# EAGLE board VisSleepSchema (EAGLE 9.6.2)
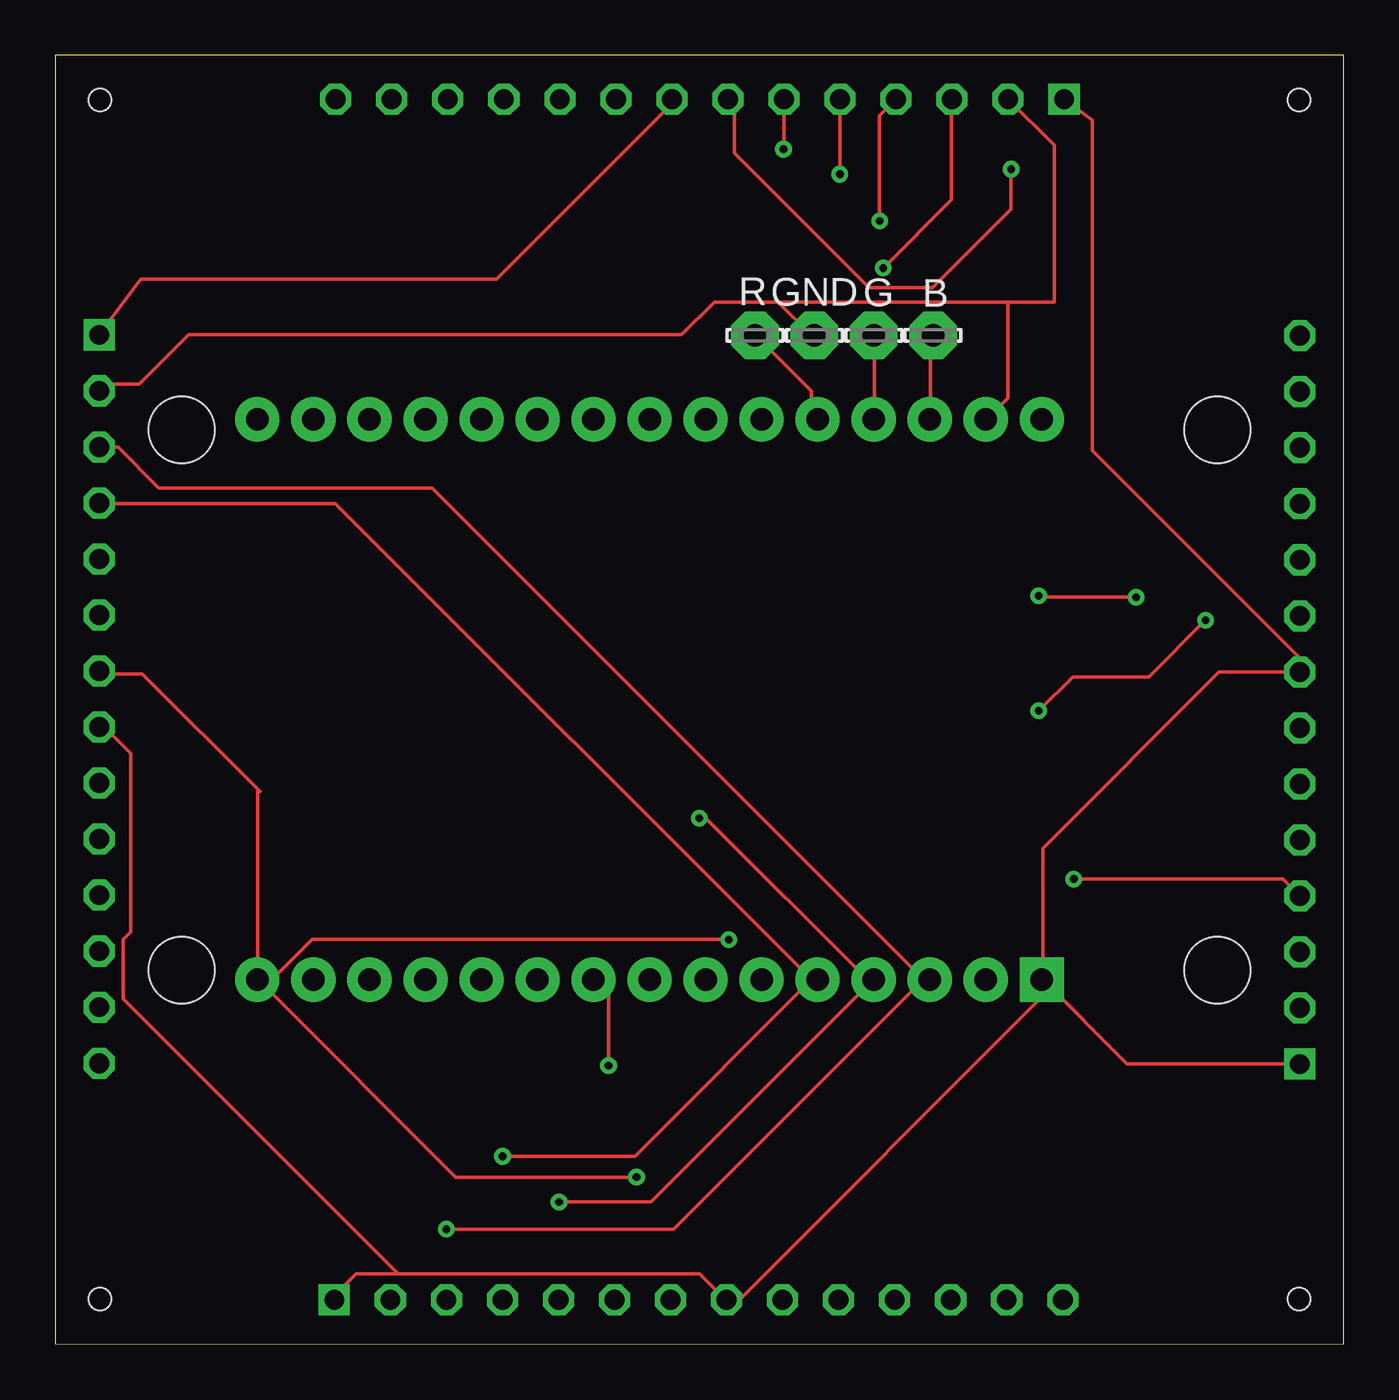
[diagram p0: board, top side]
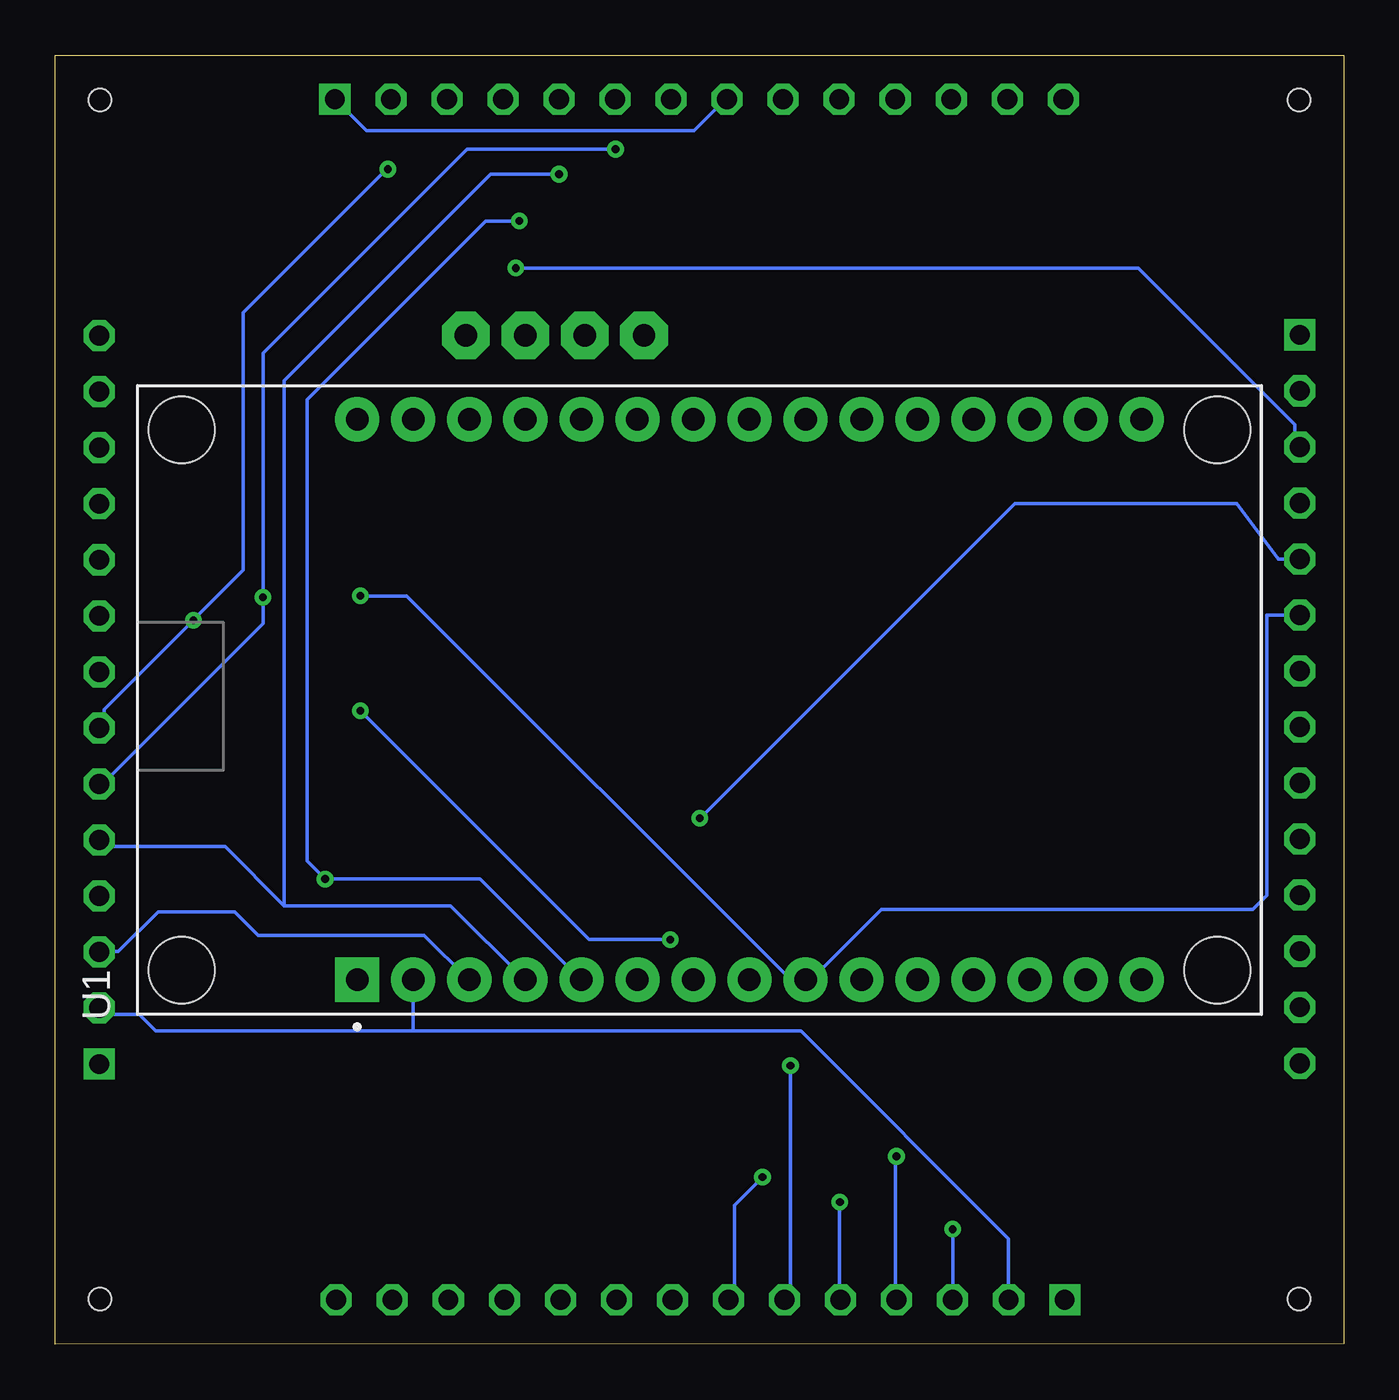
[diagram p1: board, bottom side, seen from below]

Size 58.42 x 58.44 mm. Coordinates in mm from the lower left corner, seen from the top.
Outline: 0,0.03 58.42,0 58.42,58.44 0,58.44 0,0.03
Copper layers (1*16): Top 0.035mm / dielectric 1.5mm / Bottom 0.035mm
Design rules "default": minimum track width 6mil, minimum drill 0.35mm, track to track 6mil, track to pad 6mil, pad to pad 6mil, via to via 6mil, smd to smd 6mil, copper to edge 40mil, drill to drill 6mil, minimum pad ring 10mil, minimum via ring 8mil, stop-mask expansion 4mil, vias tented up to drill 0mil, thermal gap 10mil
Holes 1 mm at 2.03,56.41 56.39,56.41 2.03,2.06 56.39,2.06

## Footprints (pad centres in the part's own frame; a part is rotated, then mirrored left to right if it is on the bottom)
2.8_LCD = drill 0.9 square: 1 8.49,2 | drill 0.9 octagon: 2 11.03,2; 3 13.57,2; 4 16.11,2; 5 18.65,2; 6 21.19,2; 7 23.73,2; 8 26.27,2; 9 28.81,2; 10 31.35,2; 11 33.89,2; 12 36.43,2; 13 38.97,2; 14 41.51,2
LSP10 = drill 1.016 pad 2.159 octagon: MP 0,0
MODULE_ESP32_DEVKIT_V1 = drill 1.02 pad 2 square: 1 -12.7,15.515 | drill 1.02 pad 2: 2 -12.7,12.975; 3 -12.7,10.435; 4 -12.7,7.895; 5 -12.7,5.355; 6 -12.7,2.815; 7 -12.7,0.275; 8 -12.7,-2.265; 9 -12.7,-4.805; 10 -12.7,-7.345; 11 -12.7,-9.885; 12 -12.7,-12.425; 13 -12.7,-14.965; 14 -12.7,-17.505; 15 -12.7,-20.045; 16 12.7,-20.045; 17 12.7,-17.505; 18 12.7,-14.965; 19 12.7,-12.425; 20 12.7,-9.885; 21 12.7,-7.345; 22 12.7,-4.805; 23 12.7,-2.265; 24 12.7,0.275; 25 12.7,2.815; 26 12.7,5.355; 27 12.7,7.895; 28 12.7,10.435; 29 12.7,12.975; 30 12.7,15.515 | hole 3: -12.28,-23.475; 12.23,-23.475; 12.23,23.475; -12.28,23.475

## Placement (x,y rotation side)
A1  TFT  [2.8_LCD]  4.17,0.03 0 top
A2  TFT  [2.8_LCD]  0,54.25 270 top
A3  TFT  [2.8_LCD]  54.23,58.45 180 top
A4  TFT  [2.8_LCD]  58.42,4.22 90 top
B  LSP10  [LSP10]  39.8,45.75 0 top
G  LSP10  [LSP10]  37.11,45.75 0 top
GND  LSP10  [LSP10]  34.42,45.75 0 top
R  LSP10  [LSP10]  31.73,45.75 0 top
U1  ESP32-DEVKIT-V1  [MODULE_ESP32_DEVKIT_V1]  29.21,29.24 90 bottom

## Library data of the parts
A1-A4 = tft
B G GND R = solpad
U1 = ESP32-DEVKIT-V1; AVAILABILITY: Not in stock; CHECK_PRICES: https://www.snapeda.com/parts/ESP32-DEVKIT-V1/Do+it/view-part/?ref=eda; DESCRIPTION: Dual core, Wi-Fi: 2.4 GHz up to 150 Mbits/s,BLE (Bluetooth Low Energy) and legacy Bluetooth, 32 bits, Up to 240 MHz; MF: Do it; MP: ESP32-DEVKIT-V1; PACKAGE: None; PRICE: None; SNAPEDA_LINK: https://www.snapeda.com/parts/ESP32-DEVKIT-V1/Do+it/view-part/?ref=snap

## Nets
N$1: A1.1 A1.8 A2.1 A2.8 A3.1 A3.8 A4.1 A4.8 U1.1
N$2: A2.2 A3.2 GND.MP U1.29
N$3: A1.3 A2.3 A3.3 A4.3 U1.3
N$4: B.MP U1.28
N$5: G.MP U1.27
N$6: A1.4 A2.4 A3.4 A4.4 U1.5
N$7: A1.5 A2.5 A3.5 A4.5 U1.4
N$8: A1.6 A2.6 A3.6 A4.6 U1.9
N$9: A1.7 A2.7 A3.7 A4.7 U1.15
N$10: R.MP U1.26
S$1: A1.2
S$2: A4.2 U1.2

## Tracks (layer width: path | path; a pad name or v marks a point on that pad's centre or on a via)
N$1
  Top 0.152: A2.1 3.89,48.3 20.02,48.3 27.94,56.22 A3.8 | 44.77,16.54 48.58,12.73 56.2,12.73 A4.1 | 44.77,16.54 44.77,22.49 52.76,30.49 A4.8 56.42,31.12 47.03,40.51 47.03,55.48 A3.1 | 44.77,16.54 U1.1 44.73,15.74 30.7,1.71 30.16,2.25 | 15.56,3.2 29.21,3.2 29.96,2.45 30.16,2.25 | 15.56,3.2 13.65,3.2 12.7,2.25 A1.1 | A2.8 2.23,27.98 3.43,26.78 3.43,18.71 3.09,18.36 3.09,15.67 15.56,3.2 | 30.16,2.25 A1.8
  Bottom 0.152: A3.1 44.31,55.02 29.46,55.02 28.26,56.22 A3.8
N$2
  Top 0.152: 43.18,47.26 43.18,42.89 42.23,41.94 U1.29 | A3.2 45.29,54.36 45.29,47.26 43.18,47.26 | 32.78,47.26 29.88,47.26 28.4,45.77 6.06,45.77 3.81,43.52 2.22,43.52 A2.2 | 32.78,47.26 34.29,45.75 GND.MP | 32.78,47.26 43.18,47.26
N$3  (via drill 0.35)
  Top 0.152: v17.73,5.22 v17.74,5.21 18.05,5.21 18.06,5.21 28.04,5.21 39.37,16.54 | 39.37,16.54 17.08,38.82 4.7,38.82 2.86,40.67 2.22,40.67 A2.3 | 39.37,16.54 U1.3 | v37.54,48.79 40.64,51.89 40.64,56.22 A3.3
  Bottom 0.152: A1.3 17.73,2.03 v17.73,5.22 | A4.3 56.2,17.81 55.56,17.81 53.76,19.61 50.29,19.61 49.23,18.54 41.69,18.54 39.69,16.54 U1.3 | v37.54,48.79 9.31,48.79 2.22,41.71 2.22,40.98 A2.3
N$4
  Top 0.152: U1.28 39.69,41.94 39.69,45.75 B.MP
N$5
  Top 0.152: U1.27 37.15,41.94 37.15,45.75 G.MP
N$6  (via drill 0.35)
  Top 0.152: v20.28,8.52 26.28,8.52 34.29,16.54 | 34.29,16.54 12.7,38.13 2.22,38.13 A2.4 | 34.29,16.54 U1.5 | A4.4 55.65,21.09 v46.18,21.09 | A3.4 37.38,55.7 v37.38,50.93
  Bottom 0.152: v20.28,8.52 20.32,8.48 20.32,2.25 A1.4 | U1.5 34.61,16.54 39.17,21.09 v46.18,21.09 47,21.92 47,42.82 38.9,50.93 v37.38,50.93
N$7  (via drill 0.35)
  Top 0.152: v22.85,6.45 27.01,6.45 37.1,16.54 U1.4 36.83,16.54 | 36.82,16.54 29.5,23.85 v29.2,23.85 | A3.5 v35.57,53.05
  Bottom 0.152: v22.85,6.45 22.86,6.44 22.86,2.25 A1.5 | 47.98,19.88 40.49,19.88 37.15,16.54 U1.4 | A4.5 56.2,22.57 50.72,22.57 48.03,19.88 48.03,43.69 38.67,53.05 v35.57,53.05 | v29.2,23.85 14.92,38.13 4.86,38.13 2.98,35.6 A2.5
N$8  (via drill 0.35)
  Top 0.152: v25.08,12.64 25.08,15.9 24.45,16.54 U1.9 | A3.6 33.04,54.2 v33.02,54.18 | v49,33.87 44.59,33.87 v44.59,33.93
  Bottom 0.152: v25.08,12.64 25.08,2.25 A1.6 | A2.6 3.49,33.06 3.49,20.35 4.13,19.71 20.96,19.71 24.13,16.54 U1.9 25.08,16.54 42.48,33.93 v44.59,33.93 | v33.02,54.18 39.75,54.18 48.98,44.95 48.98,33.88 v49,33.87 49,32.68 56.2,25.48 56.2,25.43 A4.6
N$9  (via drill 0.35)
  Top 0.152: v26.35,7.58 18.16,7.58 9.53,16.22 | 9.53,16.22 9.21,16.54 U1.15 | A2.7 2.13,30.4 3.96,30.4 9.29,25.06 9.17,25.06 U1.15 | v43.33,53.28 43.33,51.47 39.76,47.9 36.89,47.9 30.8,54 30.8,56.22 A3.7 | 9.53,16.22 11.66,18.35 v30.53,18.35 | v52.15,32.83 49.58,30.26 46.13,30.26 v44.59,28.73 | 9.53,16.22 U1.15
  Bottom 0.152: v26.35,7.58 27.62,6.31 27.62,2.25 A1.7 | v43.33,53.28 43.38,53.28 49.9,46.76 49.9,35.1 52.15,32.86 v52.15,32.83 56.2,28.78 56.2,27.97 A4.7 | v44.59,28.73 34.21,18.35 v30.53,18.35
N$10
  Top 0.152: U1.26 34.29,41.94 34.29,43.21 31.75,45.75 R.MP
S$1
  Bottom 0.152: 42.19,14.22 24.62,14.22 15.2,4.79 A1.2
S$2
  Bottom 0.152: A4.2 56.2,14.95 54.61,14.95 53.87,14.21 42.19,14.21 U1.2